# EAGLE board TSL2561 Luminosity Sensor Breakout (EAGLE 6.4)
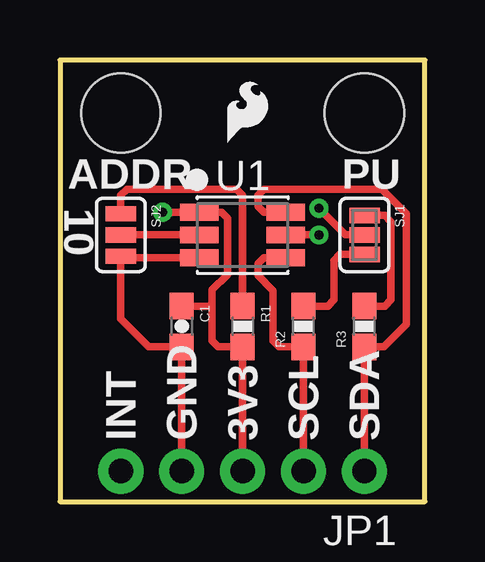
[diagram p0: board, top side]
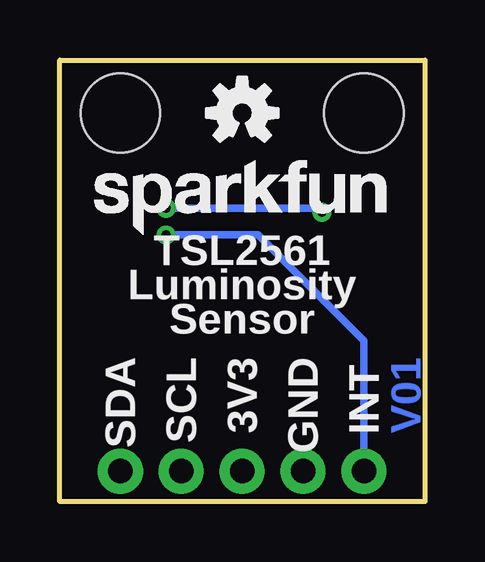
[diagram p1: board, bottom side, seen from below]

Size 15.22 x 18.4 mm. Coordinates in mm from the lower left corner, seen from the top.
Outline: 0,0 15.22,0 15.22,18.4 0,18.4 0,0
Copper layers (1*16): Top 0.035mm / dielectric 1.5mm / Bottom 0.035mm
Design rules "default": minimum track width 10mil, minimum drill 24mil, track to track 8mil, track to pad 8mil, pad to pad 8mil, via to via 8mil, smd to smd 8mil, copper to edge 40mil, drill to drill 8mil, minimum pad ring 10mil, minimum via ring 8mil, stop-mask expansion 4mil, vias tented up to drill 0mil, thermal gap 10mil

## Footprints (pad centres in the part's own frame; a part is rotated, then mirrored left to right if it is on the bottom)
0603-CAP = smd 1.1 x 1: 1 -0.85,0; 2 0.85,0
1X05_ROUNDONLY_NOSILK = drill 1.016 pad 1.88: 1 0,0; 2 2.54,0; 3 5.08,0; 4 7.62,0; 5 10.16,0
0603-RES = smd 1.1 x 1: 1 -0.85,0; 2 0.85,0
SJ_3_PASTE1&2&3 = smd 0.635 x 1.27: 1 -0.813,0; 2 0,0; 3 0.813,0
SJ_3 = smd 0.635 x 1.27: 1 -0.889,0; 2 0,0; 3 0.889,0
STAND-OFF = hole 3.302: 0,0
TMB-6 = smd 1.6 x 0.7: 1 -1.8,0.95; 2 -1.8,0; 3 -1.8,-0.95; 4 1.8,-0.95; 5 1.8,0; 6 1.8,0.95

## Placement (x,y rotation side)
C1  0.1uF  [0603-CAP]  5.08,7.3 270 top
FRAME1  FRAME-LETTER  [CREATIVE_COMMONS]  -22.86,-10.16 0 top  (outside the outline)
JP1  [1X05_ROUNDONLY_NOSILK]  12.7,1.27 180 top
LOGO1  OSHW-LOGOS  [OSHW-LOGO-S]  7.62,16.19 0 bottom
LOGO2  LOGO-SFENW2  [SFE-NEW-WEB]  13.81,11.11 0 bottom
LOGO3  SFE_LOGO_FLAME.1_INCH  [SFE_LOGO_FLAME_.1]  6.67,14.61 0 top
R1  10K  [0603-RES]  7.62,7.3 270 top
R2  4.7K  [0603-RES]  10.16,7.3 90 top
R3  4.7K  [0603-RES]  12.7,7.3 90 top
SJ1  [SJ_3_PASTE1&2&3]  12.7,11.11 270 top
SJ2  [SJ_3]  2.54,11.11 270 top
STANDOFF1  STAND-OFF  [STAND-OFF]  2.54,16.19 0 top
STANDOFF2  STAND-OFF  [STAND-OFF]  12.7,16.19 0 top
U1  TSL2561T  [TMB-6]  7.62,11.11 0 top

## Library data of the parts
C1 = SparkFun-Capacitors
FRAME1 LOGO1-LOGO3 = SparkFun-Aesthetics
JP1 SJ1 SJ2 U1 = mike-temp
R1-R3 = SparkFun-Resistors
STANDOFF1 STANDOFF2 = SparkFun-Electromechanical

## Nets
3.3V: C1.1 JP1.3 R1.2 SJ1.2 U1.1
GND: C1.2 JP1.4 SJ2.3 U1.3
INT: JP1.5 U1.5
N$2: R1.1 SJ2.1
N$3: SJ2.2 U1.2
N$8: R3.2 SJ1.1
N$9: R2.2 SJ1.3
SCL: JP1.2 R2.1 U1.4
SDA: JP1.1 R3.1 U1.6

## Tracks (layer width: path | path; a pad name or v marks a point on that pad's centre or on a via)
3.3V  (via drill 0.38)
  Top 0.305: JP1.3 R1.2 6.6,6.45 6.35,6.71 6.35,8.15 | C1.1 6.35,8.15 | SJ1.2 11.91,11.11 v10.79,12.22 | v4.29,12.06 U1.1 6.73,12.06 6.99,11.81 6.99,9.46 6.35,8.83 6.35,8.15
  Bottom 0.305: v10.79,12.22 4.45,12.22 v4.29,12.06
GND
  Top 0.305: JP1.4 C1.2 3.71,6.45 2.54,7.62 SJ2.3 2.54,10.16 U1.3
INT  (via drill 0.38)
  Top 0.305: U1.5 v10.79,11.11
  Bottom 0.305: v10.79,11.11 6.95,11.11 2.54,6.7 JP1.5
N$2
  Top 0.305: SJ2.1 2.54,12.76 2.79,13.02 7.37,13.02 7.62,12.76 R1.1
N$3
  Top 0.305: U1.2 SJ2.2
N$8
  Top 0.305: SJ1.1 13.56,11.93 13.81,11.67 13.81,8.41 13.56,8.15 R3.2
N$9
  Top 0.305: R2.2 11.18,8.15 11.43,8.41 11.43,10.05 11.68,10.3 SJ1.3
SCL
  Top 0.305: JP1.2 R2.1 9.14,6.45 8.89,6.71 8.89,8.79 8.26,9.43 8.26,9.91 8.51,10.16 U1.4
SDA
  Top 0.305: JP1.1 R3.1 13.51,6.45 14.45,7.39 14.45,12 13.43,13.02 8.51,13.02 8.26,12.76 8.26,12.32 8.51,12.06 U1.6

## Text on the board
Bottom: V01
tPlace: ADDR | PU | 10 | INT | GND | 3V3 | SCL | SDA
bPlace: TSL2561 | Luminosity | Sensor | INT | GND | 3V3 | SCL | SDA
tValues: M Grusin